# Altium PCB A5000_8MB.pcbdoc (part 2 of 2)
Units mm, origin at the board's own origin, x right, y up, seen from the top; angles counter-clockwise.
Board outline 99.95 x 80.31 mm, 4 copper layers (TopLayer, GND, VCC, BottomLayer), stack 1.659 mm thick; 71 components, 180 nets, 691 pads, 418 vias.
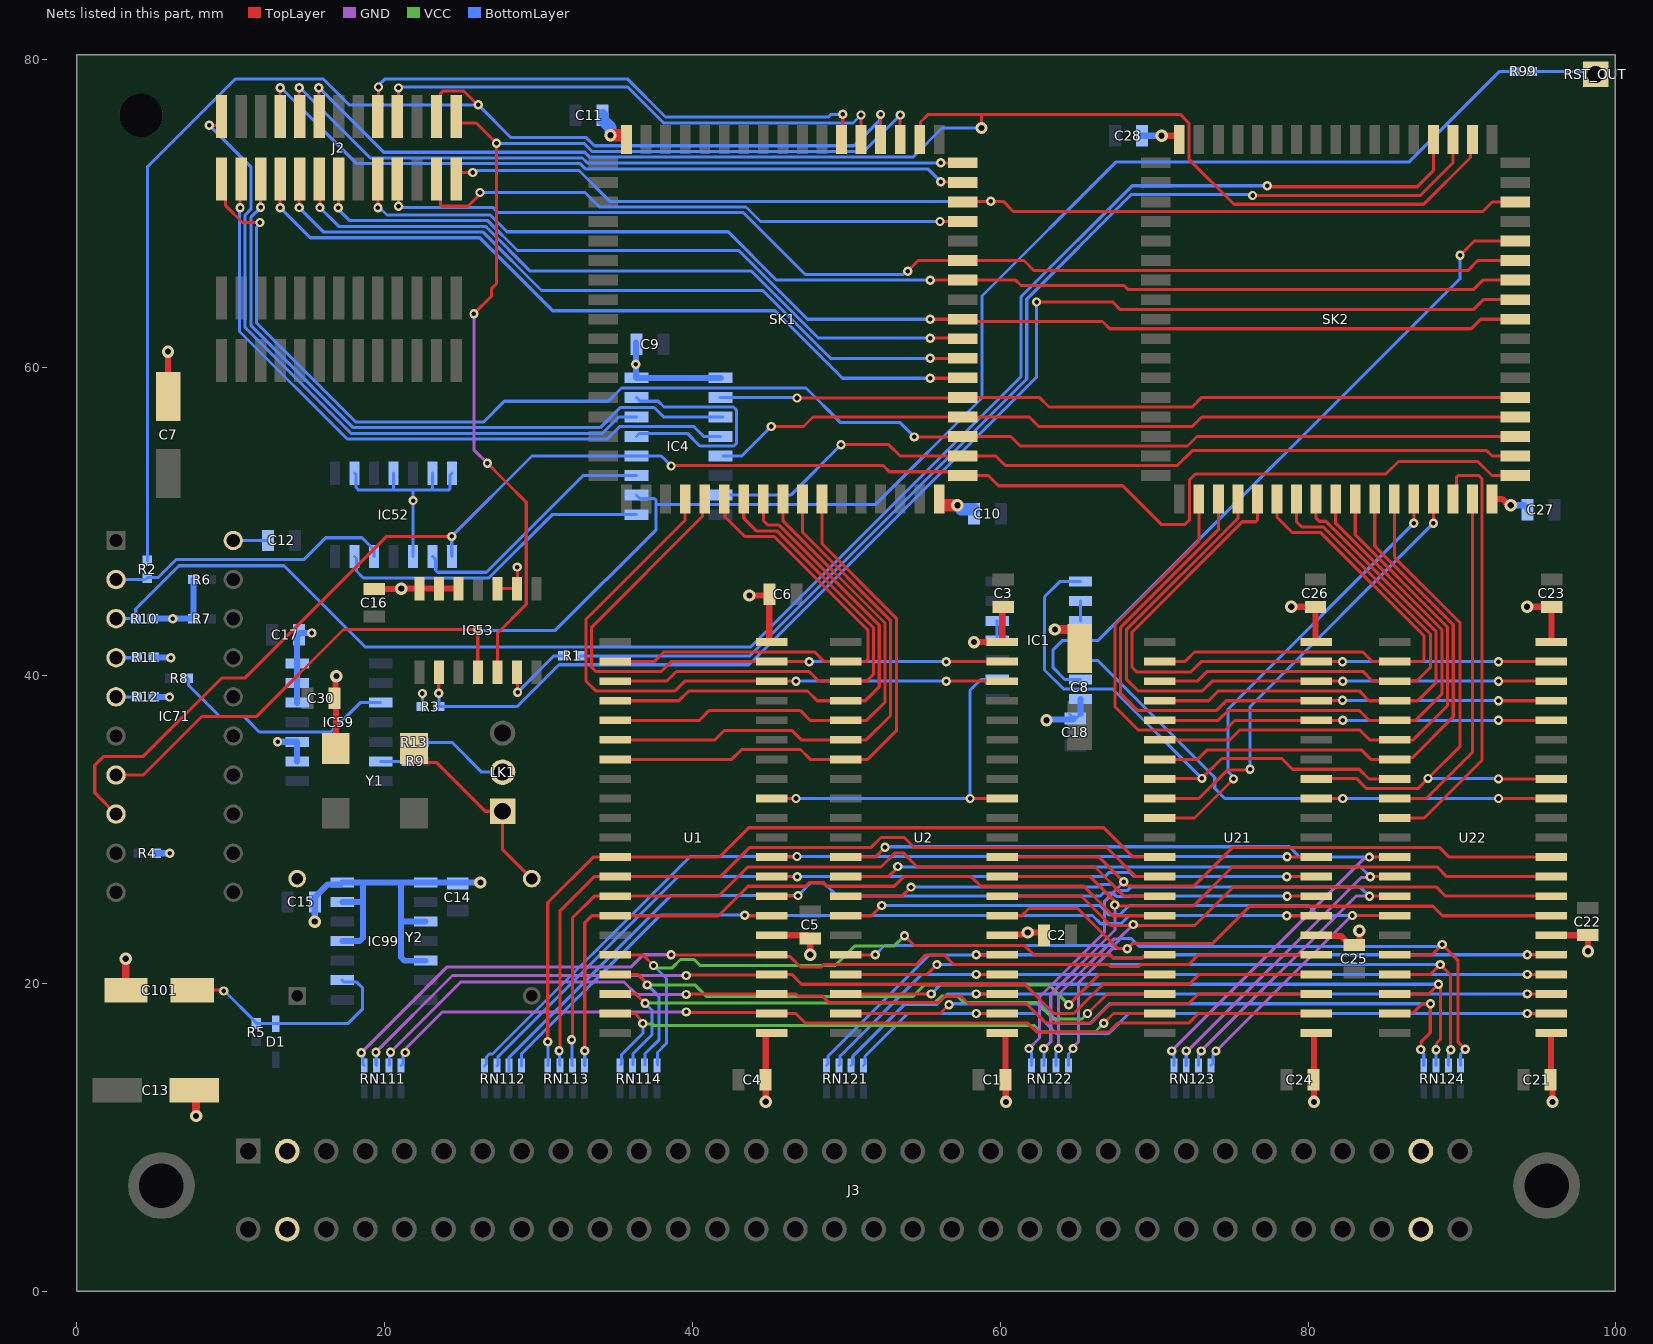
[diagram p4: the nets of this part, all layers, seen from the top]

## Via types
v1: diameter 0.6, hole 0.3, TopLayer to BottomLayer, tented both sides, 338 vias
v2: diameter 0.8, hole 0.4, TopLayer to BottomLayer, tented both sides, 80 vias

## Nets (pads, with @x,y where several pads share a name; then routed paths per layer and width w, separated by ;. In a path a pad name is that pad's centre, name@x,y a point inside that pad or via, vN(x,y) a via of type N, cw(c..) or ccw(c..) an arc to the next point about the centre after c; other vN are vias at no path point) (continued)
M1RA2: SK1.30 U1.19 U2.19 | length 42.1
  TopLayer w0.2: SK1.30@39.522,51.464 39.522,50.101 33.079,43.658 33.079,39.628 33.71,38.997 38.872,38.997 39.499,39.624 44.895,39.624 v1(46.722,39.624) ; v1(56.487,39.624) U2.19@60.192,39.624
  BottomLayer w0.2: v1(46.722,39.624) v1(56.487,39.624)
M1RA3: SK1.31 U1.20 U2.20 | length 41.1
  TopLayer w0.2: SK1.31@40.792,51.464 40.64,51.312 40.64,50.327 33.449,43.136 33.449,40.528 33.718,40.259 37.976,40.259 38.611,40.894 44.895,40.894 v1(47.579,40.894) ; v1(56.487,40.894) U2.20@60.192,40.894
  BottomLayer w0.2: v1(47.579,40.894) v1(56.487,40.894)
M1RA4: SK1.32 U1.23 U2.23 | length 32.7
  TopLayer w0.2: U1.23@34.735,40.894 37.512,40.894 38.147,41.529 47.929,41.529 48.564,40.894 U2.23@49.962,40.894 51.278,40.894 51.396,41.012 51.396,42.948 45.322,49.022 43.405,49.022 42.1,50.327 42.1,51.427 SK1.32@42.062,51.464
M1RA5: SK1.33 U1.24 U2.24 | length 33.4
  TopLayer w0.2: U1.24@34.735,39.624 38.316,39.624 38.951,40.259 47.579,40.259 48.214,39.624 50.032,39.624 51.321,39.624 51.766,40.069 51.766,43.101 45.475,49.392 44.15,49.392 43.332,50.209 SK1.33@43.332,51.464
M1RA6: SK1.34 U1.25 U2.25 | length 34.1
  TopLayer w0.2: U1.25@34.735,38.354 39.116,38.354 39.753,38.991 47.471,38.991 48.108,38.354 U2.25@49.962,38.354 51.224,38.354 52.136,39.266 52.136,43.254 45.628,49.762 44.903,49.762 44.602,50.063 SK1.34@44.602,51.464
M1RA7: SK1.35 U1.26 U2.26 | length 34.7
  TopLayer w0.2: U1.26@34.735,37.084 40.454,37.084 41.097,37.726 46.995,37.726 47.637,37.084 50.032,37.084 51.331,37.084 52.506,38.259 52.506,43.407 45.872,50.041 SK1.35@45.872,51.464
M1RA8: SK1.36 U1.27 U2.27 | length 35.8
  TopLayer w0.2: U1.27@34.735,35.814 41.458,35.814 42.077,36.433 46.446,36.433 47.064,35.814 50.032,35.814 51.296,35.814 52.876,37.394 52.876,43.561 47.142,49.294 SK1.36@47.142,51.464
M1RA9: SK1.37 U1.28 U2.28 | length 36.9
  TopLayer w0.2: U1.28@34.735,34.544 42.561,34.544 43.2,35.183 47.014,35.183 47.653,34.544 50.205,34.544 51.384,34.544 53.246,36.406 53.246,43.714 48.412,48.548 SK1.37@48.412,51.464
M1WE: IC1.2 U1.13 U2.13 | length 24.4
  TopLayer w0.2: U1.13@44.895,32.004 v1(46.722,32.004) ; v1(58.037,32.004) U2.13@60.192,32.004
  BottomLayer w0.2: v1(46.722,32.004) v1(58.037,32.004) 58.037,39.028 58.749,39.74 IC1.2@59.788,39.74
M2ABRT: IC53.2 R3.1 SK2.53 | length 86.4
  TopLayer w0.2: v1(23.512,38.834) 23.512,40.197 IC53.2@23.529,40.214 ; v1(62.358,64.262) 67.306,64.262 67.804,63.764 90.737,63.764 91.387,64.414 SK2.53@93.472,64.414
  BottomLayer w0.2: v1@23.521,38.822 R3.1@23.521,37.978 28.61,37.978 31.326,40.695 43.677,40.695 62.358,59.376 v1(62.358,64.262)
M2DBE: IC1.11 IC1.13 SK2.56 | length 45.2
  TopLayer w0.2: v1(89.877,67.304) 90.797,68.224 SK2.56@93.472,68.224
  BottomLayer w0.2: IC1.13@65.212,39.74 64.183,39.74 63.431,40.492 63.431,41.658 64.053,42.28 IC1.11@65.212,42.28 66.369,42.28 89.877,65.788 v1(89.877,67.304)
M2nCAS0: SK2.39 U21.31 | length 29.2
  TopLayer w0.2: U21.31@70.362,30.734 72.616,30.734 v1(75.156,33.274) ; v1(86.872,49.885) SK2.39@86.872,51.464
  BottomLayer w0.2: v1(75.156,33.274) 75.156,33.382 74.804,33.733 74.804,37.817 v1(86.872,49.885)
M2nCAS1: SK2.40 U21.30 | length 29.1
  TopLayer w0.2: U21.30@70.362,32.004 72.898,32.004 74.738,33.844 76.168,33.844 v1(76.229,33.905) ; v1(88.142,49.885) SK2.40@88.142,51.464
  BottomLayer w0.2: v1(76.229,33.905) 76.229,37.972 v1(88.142,49.885)
M2nCAS2: SK2.41 U22.31 | length 28.8
  TopLayer w0.2: U22.31@85.631,30.734 87.538,30.734 91.302,34.498 91.302,52.777 91.094,52.984 89.754,52.984 89.637,52.867 89.637,51.689 SK2.41@89.412,51.464
M2nCAS3: SK2.42 U22.30 | length 22.7
  TopLayer w0.2: U22.30@85.631,32.004 87.674,32.004 90.682,35.012 SK2.42@90.682,51.464
M2nRAS: SK2.38 U21.14 U22.14 | length 36.8
  TopLayer w0.2: U21.14@80.334,33.274 80.368,33.308 83.122,33.308 83.791,32.639 87.123,32.639 v1(87.792,33.308) 89.877,35.393 89.877,43.406 85.602,47.681 SK2.38@85.602,51.464 ; v1(92.374,33.274) U22.14@95.758,33.274
  BottomLayer w0.2: v1(87.792,33.308) 87.809,33.291 92.357,33.291 v1(92.374,33.274)
M2OE: IC1.8 U21.29 U22.29 | length 37
  TopLayer w0.2: U21.29@70.319,33.274 70.336,33.291 73.081,33.291 v1(73.098,33.308) 74.394,34.603 78.287,34.603 78.988,33.902 83.33,33.902 83.958,33.274 U22.29@85.598,33.274
  BottomLayer w0.2: IC1.8@65.212,46.09 63.858,46.09 62.874,45.106 62.874,40.354 64.116,39.112 67.295,39.112 v1(73.098,33.308)
M2RA0: SK2.28 U21.17 U22.17 | length 45
  TopLayer w0.2: SK2.28@72.902,51.464 72.902,48.726 67.45,43.273 67.45,37.958 68.949,36.459 74.629,36.459 75.254,37.084 80.479,37.084 v1(82.247,37.084) ; v1(92.374,37.084) U22.17@95.758,37.084
  BottomLayer w0.2: v1(82.247,37.084) v1(92.374,37.084)
M2RA1: SK2.29 U21.18 U22.18 | length 44
  TopLayer w0.2: SK2.29@74.172,51.464 74.172,49.473 67.82,43.12 67.82,38.814 68.921,37.712 74.034,37.712 74.676,38.354 80.479,38.354 80.492,38.367 82.22,38.367 v1(82.233,38.381) ; v1(92.374,38.354) U22.18@95.758,38.354
  BottomLayer w0.2: v1(82.233,38.381) 82.247,38.367 92.361,38.367 v1(92.374,38.354)
M2RA2: SK2.30 U21.19 U22.19 | length 42.9
  TopLayer w0.2: SK2.30@75.442,51.464 75.442,50.219 68.19,42.967 68.19,39.748 68.943,38.995 73.135,38.995 73.764,39.624 80.479,39.624 v1(82.247,39.624) ; v1(92.374,39.624) U22.19@95.758,39.624
  BottomLayer w0.2: v1(82.247,39.624) v1(92.374,39.624)
M2RA3: SK2.31 U21.20 U22.20 | length 42.4
  TopLayer w0.2: SK2.31@76.712,51.464 76.712,50.102 76.595,49.984 75.73,49.984 68.56,42.814 68.56,40.522 68.851,40.231 72.397,40.231 73.06,40.894 80.479,40.894 v1(82.233,40.894) ; v1(92.374,40.894) U22.20@95.758,40.894
  BottomLayer w0.2: v1(82.233,40.894) v1(92.374,40.894)
M2RA4: SK2.32 U21.23 U22.23 | length 33.3
  TopLayer w0.2: U21.23@70.319,40.894 71.982,40.894 72.614,41.526 83.555,41.526 84.187,40.894 85.598,40.894 86.36,40.894 87.413,40.894 87.53,41.011 87.53,42.577 80.831,49.276 78.983,49.276 77.982,50.277 SK2.32@77.982,51.464
M2RA5: SK2.33 U21.24 U22.24 | length 33.9
  TopLayer w0.2: U21.24@70.319,39.624 72.799,39.624 73.443,40.268 83.543,40.268 84.187,39.624 85.598,39.624 87.045,39.624 87.95,40.529 87.95,42.68 80.984,49.646 79.59,49.646 79.252,49.984 SK2.33@79.252,51.464
M2RA6: SK2.34 U21.25 U22.25 | length 34.4
  TopLayer w0.2: U21.25@70.319,38.354 73.533,38.354 74.174,38.995 83.322,38.995 83.962,38.354 85.598,38.354 86.36,38.354 87.122,38.354 88.32,39.552 88.32,42.833 81.137,50.016 80.715,50.016 80.522,50.209 SK2.34@80.522,51.464
M2RA7: SK2.35 U21.26 U22.26 | length 35.1
  TopLayer w0.2: U21.26@70.319,37.084 74.168,37.084 74.802,37.718 83.328,37.718 83.962,37.084 85.598,37.084 86.995,37.084 88.69,38.779 88.69,42.987 81.792,49.885 SK2.35@81.792,51.464
M2RA8: SK2.36 U21.27 U22.27 | length 36.1
  TopLayer w0.2: U21.27@70.319,35.814 74.93,35.814 75.576,36.46 83.343,36.46 83.989,35.814 86.836,35.814 89.06,38.038 89.06,43.14 83.062,49.138 SK2.36@83.062,51.464
M2RA9: SK2.37 U21.28 U22.28 | length 37
  TopLayer w0.2: U21.28@70.319,34.544 72.827,34.544 73.445,35.161 83.46,35.161 84.077,34.544 85.598,34.544 85.714,34.66 86.781,34.66 89.43,37.309 89.43,43.293 84.332,48.391 SK2.37@84.332,51.464
M2WE: IC1.12 U21.13 U22.13 | length 36.4
  TopLayer w0.2: U21.13@80.479,32.004 v1(82.247,32.004) ; v1(92.374,32.004) U22.13@95.758,32.004
  BottomLayer w0.2: IC1.12@65.323,41.01 65.37,40.963 66.343,40.963 73.934,33.372 73.934,32.659 74.588,32.004 v1(82.247,32.004) v1(92.374,32.004)
MFLBK: IC4.7 SK1.45 SK2.45 | length 54.1
  TopLayer w0.2: v1(49.652,54.991) 52.756,54.991 53.492,54.254 SK1.45@57.552,54.254 59.712,54.254 60.332,53.634 71.508,53.634 72.478,54.604 91.602,54.604 91.952,54.254 SK2.45@93.472,54.254
  BottomLayer w0.2: IC4.7@41.809,51.714 46.376,51.714 v1(49.652,54.991)
MnBW: R1.1 SK2.63 | length 74.6
  TopLayer w0.2: v1(76.393,71.185) 87.293,71.185 89.412,73.304 SK2.63@89.412,74.824
  BottomLayer w0.2: R1.1@32.722,41.275 43.734,41.275 61.717,59.258 61.717,64.446 68.519,71.247 76.331,71.247 v1(76.393,71.185)
MnSDRQ: IC4.5 SK1.47 SK2.47 | length 53.1
  TopLayer w0.2: v1(45.122,56.174) 47.209,56.174 47.829,56.794 SK1.47@57.552,56.794 61.88,56.794 62.5,56.174 72.477,56.174 73.097,56.794 SK2.47@93.472,56.794
  BottomLayer w0.2: IC4.5@41.984,54.254 43.202,54.254 v1(45.122,56.174)
MnVDRQ: IC4.2 SK1.48 SK2.48 | length 52.2
  TopLayer w0.2: v1(46.792,58.022) 57.51,58.022 SK1.48@57.552,58.064 62.541,58.064 63.161,57.444 72.478,57.444 73.098,58.064 SK2.48@93.472,58.064
  BottomLayer w0.2: IC4.2@41.798,58.064 46.75,58.064 v1(46.792,58.022)
MRST: IC4.12 IC52.1 IC71.8 SK1.44 SK2.44 | length 111.2
  TopLayer w0.2: IC71.8@2.54,30.988 1.158,32.37 1.158,34.158 1.742,34.742 4.318,34.742 9.398,39.822 10.917,39.822 20.129,49.034 v1(24.356,49.034) ; v1(38.611,53.604) 38.641,53.634 52.386,53.634 52.786,53.234 57.302,53.234 SK1.44@57.552,52.984 59.219,52.984 59.88,52.324 67.951,52.324 70.461,49.814 71.996,49.814 72.282,50.1 72.282,52.694 72.674,53.086 85.054,53.086 85.872,53.904 91.032,53.904 91.952,52.984 SK2.44@93.472,52.984
  BottomLayer w0.2: IC52.1@24.384,47.727 24.356,47.755 v1(24.356,49.034) 29.576,54.254 IC4.12@36.359,54.254 37.961,54.254 v1(38.611,53.604)
MRST_IN: IC4.14 J2.25 | length 44.3
  TopLayer w0.2: v1(8.607,75.745) 9.128,75.745 9.398,76.015 J2.25@9.398,76.327
  BottomLayer w0.2: v1(8.607,75.745) 11.303,73.049 11.303,70.286 10.933,69.916 10.933,62.604 17.811,55.726 34.15,55.726 35.218,56.794 IC4.14@36.359,56.794
MRSTn: IC4.11 IC52.2 | length 16.7
  BottomLayer w0.2: IC52.2@23.114,47.727 23.318,47.523 23.318,46.819 23.435,46.702 26.616,46.702 32.899,52.984 IC4.11@36.359,52.984
nBW: IC53.5 J2.1 SK1.63 | length 69.6
  TopLayer w0.2: J2.1@24.638,76.327 24.638,76.16 24.908,75.89 25.946,75.89 v1(27.261,74.574) 27.261,65.452 26.928,65.119 26.928,64.625 v1(25.797,63.494) ; v1(26.676,53.781) 27.789,52.668 29.196,51.261 29.196,44.614 27.339,42.756 IC53.5@27.339,40.214 ; SK1.63@53.492,74.824 v1(53.492,76.415)
  GND w0.2: v1(25.797,63.494) 25.797,54.66 v1(26.676,53.781)
  BottomLayer w0.2: v1(27.261,74.574) 32.946,74.574 33.476,74.044 51.122,74.044 v1(53.492,76.415)
NetC101_2: C101.2 D1.1 IC99.9 R5.1 | length 16.3
  TopLayer w0.203: C101.2@7.495,19.55 C101.2@7.938,19.55 ; C101.2@8.636,18.851 C101.2@7.938,19.55 ; v1@9.543,19.572 9.52,19.55 C101.2@7.938,19.55
  BottomLayer w0.203: v1(9.543,19.492) 9.591,19.492 11.656,17.428 R5.1@11.656,17.378 12.915,17.378 17.61,17.378 18.568,18.336 18.568,19.693 18.187,20.074 17.358,20.074 IC99.9@17.239,20.193
NetIC1_4: IC1.4 IC1.5 | length 1.3
  BottomLayer w0.2: IC1.4@59.788,42.28 IC1.5@59.788,43.55
NetIC1_9: IC1.9 IC1.10 | length 1.3
  BottomLayer w0.2: IC1.10@65.212,43.55 IC1.9@65.212,44.82
NetIC4_13: IC4.13 IC4.15 | length 16
  BottomLayer w0.2: IC4.13@36.359,55.524 36.561,55.726 39.653,55.726 40.475,54.904 42.695,54.904 42.854,55.063 42.854,57.256 42.665,57.444 38.153,57.444 37.783,57.814 36.609,57.814 IC4.15@36.359,58.064
NetIC53_6: IC53.6 R1.2 | length 5.3
  TopLayer w0.2: IC53.6@28.609,40.214 28.635,40.187 v1(28.635,38.908)
  BottomLayer w0.2: v1(28.635,38.908) 31.002,41.275 R1.2@31.622,41.275
NetIC59_3: IC59.3 R8.2 | length 15
  BottomLayer w0.2: R8.2@7.19,39.822 7.263,39.749 7.263,39.339 9.264,37.338 10.838,37.338 11.852,36.324 16.505,36.324 18.408,38.227 IC59.3@19.73,38.227
NetIC59_6: IC59.6 R9.2 | length 1.7
  BottomLayer w0.2: IC59.6@19.73,34.417 R9.2@21.449,34.417
NetIC71_4: IC71.4 R11.1 | length 1.4
  BottomLayer w0.2: IC71.4@2.54,41.148 3.864,41.148 R11.1@3.895,41.179
NetIC71_5: IC71.5 R12.1 | length 1.4
  BottomLayer w0.2: IC71.5@2.54,38.608 R12.1@3.895,38.608
NetLK1_1: LK1.1 Y1.3 Y2.3 | length 12.7
  TopLayer w0.203: Y1.3@21.908,35.247 21.908,35.147 22.706,34.349 23.355,34.349 26.53,31.173 LK1.1@27.664,31.173 27.664,28.684 Y2.3@29.554,26.794
NetLK1_2: LK1.2 R13.2 | length 6
  BottomLayer w0.2: R13.2@22.484,35.647 24.369,35.647 26.303,33.713 LK1.2@27.664,33.713
NetR99_1: R99.1 RST_OUT.1 | length 4.2
  BottomLayer w0.2: R99.1@94.53,79.248 98.481,79.248 RST_OUT.1@98.679,79.05
nHSYC: J2.26 SK1.46 SK2.46 | length 98.4
  TopLayer w0.2: J2.26@9.398,72.257 9.668,71.987 9.668,70.526 10.764,69.43 v1(11.891,69.43) ; v1(54.412,55.499) 57.527,55.499 SK1.46@57.552,55.524 60.669,55.524 61.289,54.904 72.166,54.904 72.786,55.524 SK2.46@93.472,55.524
  BottomLayer w0.2: v1(11.891,69.43) 11.891,69.331 11.673,69.113 11.673,62.911 18.118,56.466 26.426,56.466 27.774,57.814 34.522,57.814 35.385,58.677 47.37,58.677 49.603,56.444 53.467,56.444 v1(54.412,55.499)
nIOGT: J2.2 SK1.58 SK2.58 | length 72.4
  TopLayer w0.2: J2.2@24.638,72.257 24.638,72.412 24.908,72.682 v1(25.721,72.682) ; SK1.58@57.552,70.764 57.595,70.807 60.184,70.807 60.846,70.144 91.353,70.144 91.973,70.764 SK2.58@93.472,70.764
  BottomLayer w0.2: v1(25.721,72.682) 25.797,72.758 25.99,72.758 26.038,72.805 32.622,72.805 34.62,70.807 v1(59.376,70.807)
nIORQ: J2.19 SK1.59 | length 48.7
  TopLayer w0.2: J2.19@13.208,76.327 v1(13.208,78.181) ; v1(56.129,72.072) 57.515,72.072 SK1.59@57.552,72.034
  BottomLayer w0.2: v1(13.208,78.181) 13.26,78.181 18.19,73.252 32.699,73.252 33.037,72.914 55.287,72.914 v1(56.129,72.072)
nMREQ: J2.8 SK1.55 SK2.55 | length 77.1
  TopLayer w0.2: J2.8@20.828,72.257 20.899,72.186 v1(20.899,70.486) ; v1(53.986,66.268) 53.986,66.275 54.665,66.954 SK1.55@57.552,66.954 61.54,66.954 62.19,66.304 90.382,66.304 91.032,66.954 SK2.55@93.472,66.954
  BottomLayer w0.2: v1(20.899,70.486) 20.976,70.409 21.199,70.409 21.216,70.392 27.046,70.392 27.371,70.067 43.319,70.067 47.332,66.054 50.896,66.054 53.669,66.054 53.882,66.268 v1(53.986,66.268)
nREF1: IC4.9 IC52.6 | length 21.1
  BottomLayer w0.2: IC52.6@18.034,47.727 18.167,47.594 18.167,46.781 18.617,46.332 26.769,46.332 30.882,50.444 IC4.9@36.359,50.444
nRMCS: J2.17 SK1.60 | length 47
  TopLayer w0.2: v1(14.445,78.181) 14.445,76.36 J2.17@14.478,76.327 ; v1(56.132,73.304) SK1.60@57.552,73.304
  BottomLayer w0.2: v1(14.445,78.181) 14.497,78.181 19.057,73.622 32.853,73.622 33.17,73.304 v1(56.132,73.304)
nRW: J2.15 SK1.62 SK2.62 | length 91.9
  TopLayer w0.2: v1(15.72,78.181) 15.72,76.355 J2.15@15.748,76.327 ; SK1.62@54.762,74.824 54.819,74.881 54.819,75.962 55.317,76.46 58.728,76.46 ; v2(58.773,75.565) 58.773,76.415 58.728,76.46 ; SK2.62@90.682,74.824 90.551,74.693 90.551,73.654 87.512,70.615 75.186,70.615 72.252,73.549 72.252,75.891 71.683,76.46 58.728,76.46
  BottomLayer w0.2: v1(15.72,78.181) 15.748,78.181 19.937,73.992 33.006,73.992 33.323,73.674 54.326,73.674 56.216,75.565 v2(58.773,75.565)
nSDAK: J2.20 SK1.49 | length 50.8
  TopLayer w0.2: v1(13.208,70.394) J2.20@13.208,72.257 ; v1(55.453,59.309) 57.527,59.309 SK1.49@57.552,59.334
  BottomLayer w0.2: v1(13.208,70.394) 15.167,68.436 26.18,68.436 30.922,63.694 45.357,63.694 49.742,59.309 v1(55.453,59.309)
nSDRQ: IC4.4 J2.24 | length 44.7
  TopLayer w0.2: v1(10.605,70.394) 10.605,72.194 J2.24@10.668,72.257
  BottomLayer w0.2: v1(10.605,70.394) 10.563,70.352 10.563,62.35 17.557,55.356 34.465,55.356 35.29,56.182 40.069,56.182 40.727,55.524 IC4.4@41.809,55.524
nSIRQ: J2.4 SK1.57 | length 37
  TopLayer w0.2: J2.4@23.368,72.257 23.617,72.008 23.617,70.603 23.734,70.486 25.409,70.486 26.194,71.271 v1(26.194,71.379) ; v1(56.082,69.494) SK1.57@57.552,69.494
  BottomLayer w0.2: v1(26.194,71.379) 33.018,71.379 33.96,70.437 43.473,70.437 44.415,69.494 v1(56.082,69.494)
nVDAK: J2.18 SK1.50 | length 49
  TopLayer w0.2: v1(14.445,70.398) 14.445,72.224 J2.18@14.478,72.257 ; v1(55.453,60.604) SK1.50@57.552,60.604
  BottomLayer w0.2: v1(14.445,70.398) 16.037,68.806 26.395,68.806 30.19,65.01 44.564,65.01 48.97,60.604 v1(55.453,60.604)
nVDRQ: IC4.3 J2.22 | length 44
  TopLayer w0.2: v1(11.938,70.414) J2.22@11.938,72.257
  BottomLayer w0.2: v1(11.938,70.414) 11.938,70.398 11.303,69.763 11.303,62.758 17.964,56.096 33.997,56.096 35.308,57.407 37.51,57.407 38.122,56.794 IC4.3@41.964,56.794
nVIDW: J2.16 SK1.51 | length 47.2
  TopLayer w0.2: J2.16@15.748,72.257 15.793,72.212 v1(15.793,70.398) ; v1(55.453,61.911) 57.516,61.911 SK1.51@57.552,61.874
  BottomLayer w0.2: v1(15.793,70.398) 17.014,69.176 26.548,69.176 29.456,66.268 43.829,66.268 48.186,61.911 v1(55.453,61.911)
phi1: J2.9 SK1.66 | length 35.1
  TopLayer w0.2: J2.9@19.558,76.327 19.599,76.368 v1(19.599,78.233) ; SK1.66@49.682,74.824 49.762,74.904 v1(49.762,76.46)
  BottomLayer w0.2: v1(19.599,78.233) 19.599,78.342 20.001,78.744 35.796,78.744 38.25,76.289 48.83,76.289 49,76.46 v1(49.762,76.46)
phi2: J2.7 SK1.65 | length 34.7
  TopLayer w0.2: J2.7@20.828,76.327 20.899,76.398 v1(20.899,78.174) ; SK1.65@50.952,74.824 v1(50.952,76.415)
  BottomLayer w0.2: v1(20.899,78.174) 20.959,78.233 35.783,78.233 38.126,75.89 50.427,75.89 v1(50.952,76.415)
RAMD0: RN111.4 U1.2 U21.2 | length 62.4
  TopLayer w0.2: v1(39.596,18.134) 39.646,18.084 45.096,18.084 U1.2@45.146,18.034 46.706,18.034 47.338,17.402 61.786,17.402 62.362,16.826 67.046,16.826 67.622,17.402 72.236,17.402 72.868,18.034 U21.2@80.522,18.034
  GND w0.2: v1(21.329,15.498) 21.405,15.575 21.405,15.791 23.748,18.134 v1(39.596,18.134)
  BottomLayer w0.2: RN111.4@21.07,14.654 21.195,14.779 21.195,15.257 21.329,15.39 v1(21.329,15.498)
RAMD1: RN111.3 U1.3 U21.3 | length 65.2
  TopLayer w0.2: v1(39.596,19.274) 39.61,19.289 45.132,19.289 U1.3@45.146,19.304 46.722,19.304 46.852,19.174 48.441,19.174 48.881,18.734 55.989,18.734 56.429,19.174 57.446,19.174 57.939,18.681 61.692,18.681 62.972,17.402 65.899,17.402 67.178,18.681 72.245,18.681 72.868,19.304 U21.3@80.522,19.304
  GND w0.2: v1(20.379,15.522) 24.935,20.078 35.544,20.078 36.348,19.274 v1(39.596,19.274)
  BottomLayer w0.2: RN111.3@20.27,14.654 20.325,14.708 20.325,15.468 v1(20.379,15.522)
RAMD2: RN111.2 U1.4 U21.4 | length 66.2
  TopLayer w0.2: v1(39.596,20.503) 39.631,20.538 45.111,20.538 U1.4@45.146,20.574 46.444,20.574 47.085,19.933 61.583,19.933 63.486,18.029 64.77,18.029 66.674,19.933 72.28,19.933 72.921,20.574 U21.4@80.522,20.574
  GND w0.2: v1(19.429,15.522) 24.41,20.503 v1(39.596,20.503)
  BottomLayer w0.2: v1(19.429,15.522) 19.45,15.501 19.45,14.675 RN111.2@19.47,14.654
RAMD3: RN111.1 U1.5 U21.5 | length 66.9
  TopLayer w0.2: v1(38.611,21.844) 45.142,21.844 45.144,21.846 45.262,21.728 46.344,21.728 47.014,21.058 48.38,21.058 48.53,21.208 54.531,21.208 55.166,21.844 56.36,21.844 56.996,21.208 67.054,21.208 67.174,21.088 69.017,21.088 69.137,21.208 72.232,21.208 72.868,21.844 U21.5@80.522,21.844
  GND w0.2: v1(18.48,15.489) 24.058,21.067 36.025,21.067 36.806,21.849 38.607,21.849 v1(38.611,21.844)
  BottomLayer w0.2: v1(18.48,15.489) 18.48,15.381 18.593,15.267 18.593,14.731 RN111.1@18.67,14.654
RAMD4: RN112.4 U1.7 U21.7 | length 58.4
  TopLayer w0.2: v1@43.405,24.393 43.414,24.384 U1.7@45.146,24.384 ; v1(78.616,24.384) U21.7@80.522,24.384
  BottomLayer w0.2: RN112.4@28.886,14.63 28.883,14.633 28.883,15.397 37.909,24.423 v1(43.396,24.423) 43.416,24.404 65.991,24.404 66.531,23.864 67.844,23.864 68.384,24.404 78.596,24.404 v1(78.616,24.384)
RAMD5: RN112.3 U1.8 U21.8 | length 60.3
  TopLayer w0.2: U1.8@45.146,25.654 v1@46.872,25.654 ; v1(78.636,25.654) U21.8@80.522,25.654
  BottomLayer w0.2: RN112.3@28.087,14.279 28.087,15.2 38.58,25.693 v1(46.855,25.693) 47.669,26.508 48.551,26.508 49.405,25.654 66.48,25.654 66.701,25.875 67.311,25.875 67.54,25.646 68.406,25.646 68.414,25.654 v1(78.636,25.654)
RAMD6: RN112.2 U1.9 U21.9 | length 60.5
  TopLayer w0.2: U1.9@45.146,26.924 v1(46.805,26.924) ; v1(78.616,26.924) U21.9@80.522,26.924
  BottomLayer w0.2: RN112.2@27.286,14.63 27.375,14.719 27.375,15.241 39.058,26.924 v1(46.805,26.924) 66.785,26.924 67.046,27.185 68.451,27.185 68.712,26.924 v1(78.616,26.924)
RAMD7: RN112.1 U1.10 U21.10 | length 61.6
  TopLayer w0.2: U1.10@45.146,28.194 v1@46.805,28.194 ; v1(78.636,28.219) 78.649,28.207 80.509,28.207 U21.10@80.522,28.194
  BottomLayer w0.2: RN112.1@26.486,14.63 26.611,14.755 26.611,15.205 26.803,15.397 27.008,15.397 39.844,28.233 v1(46.787,28.233) v1@78.616,28.233
RAMD8: RN113.1 U1.33 U21.33 | length 53.2
  TopLayer w0.2: v1(30.594,16.203) 30.594,25.244 33.543,28.194 U1.33@34.986,28.194 41.735,28.194 43.645,30.104 66.724,30.104 68.634,28.194 U21.33@70.362,28.194
  BottomLayer w0.2: v1(30.594,16.203) 30.602,16.195 30.602,14.66 RN113.1@30.595,14.654
RAMD9: RN113.2 U1.34 U21.34 | length 52.1
  TopLayer w0.2: v1(31.333,15.606) 31.401,15.675 31.401,24.713 33.612,26.924 U1.34@34.986,26.924 41.809,26.924 43.714,28.829 51.618,28.829 52.253,29.464 53.759,29.464 54.394,28.829 66.899,28.829 68.804,26.924 U21.34@70.362,26.924
  BottomLayer w0.2: v1(31.333,15.606) 31.364,15.575 31.364,14.685 RN113.2@31.395,14.654
RAMD10: RN113.3 U1.35 U21.35 | length 50.7
  TopLayer w0.2: v1(32.145,16.333) 32.201,16.389 32.201,24.244 33.611,25.654 U1.35@34.986,25.654 41.686,25.654 43.587,27.555 52.25,27.555 53.142,28.448 53.721,28.448 54.614,27.555 66.154,27.555 68.055,25.654 U21.35@70.362,25.654
  BottomLayer w0.2: v1(32.145,16.333) 32.17,16.308 32.17,14.679 RN113.3@32.195,14.654
RAMD11: RN113.4 U1.36 U21.36 | length 49.1
  TopLayer w0.2: v1(33.001,15.606) 33.001,23.923 33.462,24.384 U1.36@34.986,24.384 41.689,24.384 43.607,26.302 47.353,26.302 47.606,26.554 48.462,26.554 48.714,26.302 53.11,26.302 53.732,26.924 58.123,26.924 58.745,26.302 65.415,26.302 66.863,24.854 66.863,24.848 67.197,24.514 67.203,24.514 67.333,24.384 U21.36@70.362,24.384
  BottomLayer w0.2: RN113.4@32.995,14.654 32.998,14.657 32.998,15.603 v1(33.001,15.606)
RAMD12: RN114.4 U1.38 U21.38 | length 44.6
  TopLayer w0.2: U1.38@34.986,21.844 36.774,21.844 v1(37.465,21.153) ; v1(53.775,23.083) 54.394,22.464 61.565,22.464 62.185,21.844 67.135,21.844 67.349,21.63 69.22,21.63 69.28,21.69 70.208,21.69 U21.38@70.362,21.844
  VCC w0.2: v1(37.465,21.153) 37.573,21.153 37.727,20.999 38.686,20.999 39.224,21.538 40.112,21.538 40.497,21.153 49.285,21.153 50.56,22.428 53.12,22.428 v1(53.775,23.083)
  BottomLayer w0.2: v1(37.465,21.153) 38.316,20.302 38.316,16.09 37.725,15.499 RN114.4@37.725,14.7
RAMD13: RN114.3 U1.39 U21.39 | length 43.6
  TopLayer w0.2: U1.39@34.986,20.574 36.449,20.574 37.098,19.926 v1@37.098,19.858 ; v1(64.45,18.604) 66.42,20.574 U21.39@70.362,20.574
  VCC w0.2: v1(37.064,19.892) 40.153,19.892 40.922,19.123 54.303,19.123 55.072,19.892 63.161,19.892 v1(64.45,18.604)
  BottomLayer w0.2: RN114.3@36.925,14.7 36.905,14.72 36.905,15.397 37.833,16.325 37.833,19.123 v1@37.098,19.858
RAMD14: RN114.2 U1.40 U21.40 | length 41.8
  TopLayer w0.2: U1.40@34.986,19.304 36.318,19.304 36.918,18.704 v1(36.92,18.704) ; v1@36.919,18.699 v1@36.919,18.703 ; v1(65.669,18.034) 66.939,19.304 U21.40@70.362,19.304
  VCC w0.2: v1(36.92,18.704) 55.719,18.704 56.189,19.174 57.211,19.174 57.651,18.734 62.378,18.734 63.435,17.677 65.312,17.677 v1(65.669,18.034)
  BottomLayer w0.2: RN114.2@36.125,14.7 36.125,15.397 37.374,16.646 37.374,18.244 v1@36.919,18.699
RAMD15: RN114.1 U1.41 U21.41 | length 39.7
  TopLayer w0.2: U1.41@34.986,18.034 36.271,18.034 36.494,17.812 36.494,17.773 v1@36.774,17.493 ; v1(66.724,17.402) 67.356,18.034 U21.41@70.362,18.034
  VCC w0.2: v1(36.774,17.385) 36.797,17.361 37.374,17.361 37.474,17.261 62.189,17.261 62.624,16.826 66.148,16.826 v1(66.724,17.402)
  BottomLayer w0.2: RN114.1@35.325,14.7 35.375,14.75 35.375,15.333 36.774,16.731 v1@36.774,17.493
RAMD16: RN121.4 U2.2 U22.2 | length 49.1
  TopLayer w0.2: v1(58.437,18.034) U2.2@60.122,18.034 ; v1(94.234,18.034) U22.2@95.791,18.034
  BottomLayer w0.2: RN121.4@51.111,14.654 51.214,14.757 51.214,15.251 53.997,18.034 v1(58.437,18.034) 62.34,18.034 63.624,16.75 67.054,16.75 68.338,18.034 v1(94.234,18.034)
RAMD17: RN121.3 U2.3 U22.3 | length 49.4
  TopLayer w0.2: v1(58.437,19.304) U2.3@60.122,19.304 ; v1(94.234,19.304) U22.3@95.791,19.304
  BottomLayer w0.2: RN121.3@50.311,14.654 50.414,14.757 50.414,15.251 53.767,18.604 55.859,18.604 56.559,19.304 v1(58.437,19.304) v1(94.234,19.304)
RAMD18: RN121.2 U2.4 U22.4 | length 50.7
  TopLayer w0.2: v1(58.435,20.574) U2.4@60.122,20.574 ; v1(94.234,20.574) U22.4@95.791,20.574
  BottomLayer w0.2: RN121.2@49.511,14.654 49.593,14.736 49.593,15.272 54.895,20.574 v1(58.435,20.574) v1(94.234,20.574)
RAMD19: RN121.1 U2.5 U22.5 | length 52.2
  TopLayer w0.2: v1(58.435,21.844) U2.5@60.122,21.844 ; v1(94.234,21.853) 94.239,21.849 95.787,21.849 U22.5@95.791,21.844
  BottomLayer w0.2: RN121.1@48.711,14.654 48.81,14.753 48.81,15.254 55.4,21.844 v1(58.435,21.844) 58.44,21.849 67.13,21.849 67.335,21.644 69.234,21.644 69.439,21.849 94.229,21.849 v1(94.234,21.853)
RAMD20: RN122.4 U2.7 U22.7 | length 48.1
  TopLayer w0.2: U2.7@60.122,24.384 61.398,24.384 61.868,24.854 65.034,24.854 67.645,22.243 v1(68.253,22.243) 68.599,22.59 73.81,22.59 76.219,24.999 88.113,24.999 88.728,24.384 U22.7@95.791,24.384
  GND w0.2: v1(64.729,15.75) 64.729,15.858 65.089,16.217 65.089,20.049 67.303,22.263 68.233,22.263 v1(68.253,22.243)
  BottomLayer w0.2: RN122.4@64.425,14.654 64.438,14.666 64.438,15.404 64.729,15.696 v1(64.729,15.75)
RAMD21: RN122.3 U2.8 U22.8 | length 49.1
  TopLayer w0.2: U2.8@60.122,25.654 65.28,25.654 67.186,23.749 68.569,23.749 v1(68.634,23.814) ; v1@68.704,23.749 72.643,23.749 75.154,26.259 88.318,26.259 88.923,25.654 U22.8@95.791,25.654
  GND w0.2: v1(63.779,15.75) 63.779,19.263 67.399,22.883 67.703,22.883 v1(68.634,23.814)
  BottomLayer w0.2: RN122.3@63.625,14.654 63.625,15.487 63.779,15.642 v1(63.779,15.75)
RAMD22: RN122.2 U2.9 U22.9 | length 50.3
  TopLayer w0.2: U2.9@60.122,26.924 65.835,26.924 67.439,25.32 v1@67.554,25.205 ; v1(67.433,25.084) v1@67.554,25.205 ; U22.9@95.791,26.924 89.015,26.924 88.391,27.547 75.077,27.547 72.56,25.03 67.729,25.03 v1@67.554,25.205
  GND w0.2: v1(62.829,15.75) 63.278,16.199 63.278,19.285 67.454,23.462 67.454,25.062 v1(67.433,25.084)
  BottomLayer w0.2: RN122.2@62.825,14.654 62.827,14.656 62.827,15.748 v1(62.829,15.75)
RAMD23: RN122.1 U2.10 U22.10 | length 52.3
  TopLayer w0.2: U2.10@60.122,28.194 66.434,28.194 68.32,26.308 72.569,26.308 75.069,28.807 88.564,28.807 89.177,28.194 U22.10@95.791,28.194
  GND w0.2: v1(61.868,15.75) 62.553,16.435 62.553,19.106 66.78,23.333 66.78,25.324 v1@68.042,26.586
  BottomLayer w0.2: v1(61.868,15.75) 61.868,15.642 62.025,15.484 RN122.1@62.025,14.654
  other v1: 68.017,26.586
RAMD24: RN123.1 U2.33 U22.33 | length 55.3
  TopLayer w0.2: U2.33@49.962,28.194 51.871,28.194 v1(52.506,28.829) ; v1(83.982,28.194) U22.33@85.631,28.194
  GND w0.2: v1(71.135,15.604) 71.138,15.604 83.651,28.117 83.905,28.117 v1(83.982,28.194)
  BottomLayer w0.2: v1(52.506,28.829) 52.544,28.867 78.794,28.867 79.468,28.194 v1(83.982,28.194) ; v1(71.135,15.604) 71.135,15.496 71.285,15.346 RN123.1@71.285,14.654
RAMD25: RN123.2 U2.34 U22.34 | length 53.8
  TopLayer w0.2: U2.34@49.962,26.924 52.73,26.924 v1@53.361,27.555 ; v1(84.035,26.924) U22.34@85.631,26.924
  GND w0.2: v1(72.085,15.604) 72.183,15.604 83.435,26.856 83.968,26.856 v1(84.035,26.924)
  BottomLayer w0.2: v1(53.343,27.58) 53.368,27.555 83.404,27.555 v1(84.035,26.924) ; RN123.2@72.085,14.654 v1(72.085,15.604)
RAMD26: RN123.3 U2.35 U22.35 | length 52.6
  TopLayer w0.2: U2.35@49.962,25.654 53.606,25.654 v1(54.198,26.245) ; v1(83.989,25.654) U22.35@85.631,25.654
  GND w0.2: v1(73.06,15.604) 83.11,25.654 v1(83.989,25.654)
  BottomLayer w0.2: v1(54.198,26.245) 66.343,26.245 66.513,26.415 67.295,26.415 67.693,26.016 68.253,26.016 68.482,26.245 83.398,26.245 v1(83.989,25.654) ; RN123.3@72.885,14.654 72.885,15.321 73.06,15.496 v1(73.06,15.604)
RAMD27: RN123.4 U2.36 U22.36 | length 50.3
  TopLayer w0.2: U2.36@49.962,24.384 51.626,24.384 v1(52.296,25.053) ; v1(82.881,24.404) 82.891,24.394 85.622,24.394 U22.36@85.631,24.384
  GND w0.2: v1(74.01,15.604) 74.045,15.604 82.845,24.404 v1(82.881,24.404)
  BottomLayer w0.2: v1(52.296,25.053) 66.448,25.053 67.052,24.449 67.78,24.449 68.384,25.053 80.03,25.053 80.679,24.404 v1(82.881,24.404) ; RN123.4@73.685,14.654 73.81,14.779 73.81,15.296 74.01,15.496 v1(74.01,15.604)
RAMD28: RN124.4 U2.38 U22.38 | length 51.4
  TopLayer w0.2: U2.38@49.962,21.844 v1(51.871,21.844) ; U22.38@85.631,21.844 88.046,21.844 v1(88.715,22.513) 89.733,21.495 89.733,16.191 v1(90.214,15.71)
  BottomLayer w0.2: v1(51.871,21.844) 52.48,22.453 67.373,22.453 67.823,22.903 68.516,22.903 69.029,22.39 88.398,22.39 88.445,22.437 88.639,22.437 v1(88.715,22.513) ; RN124.4@89.915,14.654 89.915,15.404 90.214,15.703 v1(90.214,15.71)
RAMD29: RN124.3 U2.39 U22.39 | length 49
  TopLayer w0.2: U2.39@49.962,20.574 55.245,20.574 v1(55.88,21.209) ; U22.39@85.631,20.574 87.956,20.574 v1(88.59,21.208) 89.265,20.533 v1(89.265,15.671)
  BottomLayer w0.2: v1(55.88,21.209) v1(88.59,21.208) ; RN124.3@89.115,14.654 89.115,15.413 89.265,15.563 v1(89.265,15.671)
RAMD30: RN124.2 U2.40 U22.40 | length 47.3
  TopLayer w0.2: U2.40@49.962,19.304 v1(55.512,19.304) ; U22.40@85.631,19.304 87.845,19.304 v1(88.474,19.933) 88.474,19.825 88.591,19.708 88.591,16.345 88.34,16.095 88.34,15.696 v1(88.315,15.671)
  BottomLayer w0.2: v1(55.512,19.304) 56.141,19.933 v1(88.474,19.933) ; RN124.2@88.315,14.654 v1(88.315,15.671)
RAMD31: RN124.1 U2.41 U22.41 | length 46.2
  TopLayer w0.2: U2.41@49.962,18.034 56.095,18.034 v1(56.665,18.604) ; U22.41@85.631,18.034 85.681,18.084 86.83,18.084 87.413,18.666 v1(87.956,18.666) ; v1(87.325,15.696) 87.325,16.161 87.936,16.771 v1@87.936,18.646
  BottomLayer w0.2: v1(56.665,18.604) 56.728,18.666 62.57,18.666 63.86,17.376 65.818,17.376 67.108,18.666 v1(87.956,18.666) ; v1(87.325,15.696) 87.325,15.587 87.515,15.397 RN124.1@87.515,14.654
RCLK: J2.3 R2.2 SK1.64 | length 84.5
  TopLayer w0.2: J2.3@23.368,76.327 23.638,76.597 23.638,77.821 23.801,77.985 25.117,77.985 26.025,77.076 v1(26.076,77.076) ; SK1.64@52.222,74.824 v1(52.222,76.453)
  BottomLayer w0.2: R2.2@4.578,47.45 4.578,73.031 10.298,78.751 16.009,78.751 17.684,77.076 v1(26.076,77.076) 28.207,74.944 33.1,74.944 33.63,74.414 50.507,74.414 52.16,76.067 52.16,76.39 v1(52.222,76.453)
REF1: IC52.5 IC71.2 R2.1 | length 18.6
  BottomLayer w0.2: IC71.2@2.54,46.228 4.456,46.228 R2.1@4.578,46.35 5.272,46.35 6.445,47.523 14.749,47.523 16.17,48.944 18.525,48.944 19.304,48.164 IC52.5@19.304,47.727
REF2: IC71.3 R10.1 SK2.64 | length 107.4
  TopLayer w0.2: v1(77.35,71.817) 77.413,71.754 87.094,71.754 88.142,72.802 SK2.64@88.142,74.824
  BottomLayer w0.2: IC71.3@2.54,43.688 3.695,43.688 3.822,43.815 3.822,44.31 6.64,47.128 13.455,47.128 18.735,41.848 43.784,41.848 61.347,59.411 61.347,64.599 68.565,71.817 v1(77.35,71.817)
SEQ: J2.10 SK1.54 SK2.54 | length 78.2
  TopLayer w0.2: v1(19.558,70.394) J2.10@19.558,72.257 ; v1(55.453,65.684) SK1.54@57.552,65.684 60.997,65.684 61.347,65.334 68.044,65.334 68.314,65.064 90.737,65.064 91.357,65.684 SK2.54@93.472,65.684
  BottomLayer w0.2: v1(19.558,70.394) 19.666,70.394 20.145,69.916 26.855,69.916 27.942,68.828 42.316,68.828 45.459,65.684 v1(55.453,65.684)
SPMD: J2.14 SK1.52 SK2.52 | length 81.9
  TopLayer w0.2: v1(16.988,70.394) 16.988,72.227 J2.14@17.018,72.257 ; v1(55.453,63.144) SK1.52@57.552,63.144 57.705,62.992 66.638,62.992 67.106,62.524 90.591,62.524 91.211,63.144 SK2.52@93.472,63.144
  BottomLayer w0.2: v1(16.988,70.394) 16.988,70.286 17.728,69.546 26.701,69.546 28.635,67.612 43.009,67.612 47.476,63.144 v1(55.453,63.144)
SResetn: IC4.10 IC53.4 IC71.7 R99.2 | length 118.9
  TopLayer w0.2: IC71.7@2.54,33.528 4.318,33.528 8.128,37.338 11.677,37.338 17.327,42.988 v1(26.046,42.988) 26.046,40.237 IC53.4@26.069,40.214
  BottomLayer w0.2: v1(26.046,42.988) 26.108,42.926 31.092,42.926 37.639,49.473 37.639,51.094 ; IC4.10@36.359,51.714 36.58,51.493 37.522,51.493 37.639,51.376 37.639,51.094 ; R99.2@93.091,79.248 92.456,79.248 86.58,73.372 67.528,73.372 58.806,64.651 58.806,58.022 51.879,51.094 37.639,51.094
VCC: C1.1 C2.1 C3.1 C4.1 C5.1 C6.1 C7.1 C8.1 C9.1 C10.1 C11.1 C12.1 C13.1 C14.1 C15.1 C16.1 C17.1 C18.1 C21.1 C22.1 C23.1 C24.1 C25.1 C26.1 C27.1 C28.1 C30.1 C101.1 IC1.14 IC4.1 IC4.16 IC52.3 IC52.9 IC52.11 IC52.13 IC52.14 IC53.9 IC53.10 IC53.12 IC53.13 IC53.14 IC59.9 IC59.10 IC59.12 IC59.13 IC59.14 IC71.20 IC99.1 IC99.3 IC99.5 IC99.11 IC99.13 IC99.14 J3.A2 J3.A31 J3.C2 J3.C31 R3.2 R4.2 R6.2 R7.2 R10.2 R11.2 R12.2 SK1.9 SK1.43 SK2.9 SK2.43 U1.1 U1.6 U1.21 U2.1 U2.6 U2.21 U21.1 U21.6 U21.21 U22.1 U22.6 U22.21 Y1.4 Y2.4 | length 153.5
  TopLayer w0.2: C101.1@3.17,19.575 C101.1@3.195,19.55 ; IC53.10@27.339,45.638 IC53.9@28.609,45.638 28.62,45.649 v1(28.62,47.037) ; SK1.43@56.032,51.464 56.032,51.309 SK1.43@56.282,51.059 ; C8.1@65.118,41.776 C8.1@65.151,41.743 ; U22.21@95.762,42.164 U22.21@95.821,42.223
  TopLayer w0.4: v2(5.922,61.038) 5.922,58.147 C7.1@5.943,58.126 ; C13.1@7.623,13.053 C13.1@7.747,12.93 ; Y1.4@16.828,35.247 16.828,38.448 C30.1@16.748,38.528 16.803,38.583 16.803,39.898 v2(16.858,39.953) ; C16.1@19.326,45.6 19.345,45.619 21.06,45.619 v2(21.079,45.638) IC53.14@22.259,45.638 IC53.13@23.529,45.638 IC53.12@24.799,45.638 ; v2(43.693,45.19) 44.915,45.19 C6.1@44.992,45.268 44.992,42.204 U1.21@44.952,42.164 ; v2(44.756,12.296) C4.1@44.756,13.721 44.756,16.71 44.81,16.764 U1.1@44.952,16.764 ; U1.6@44.952,23.114 U1.6@45.146,23.114 47.426,23.114 C5.1@47.435,23.123 ; C5.1@47.646,22.894 47.655,22.885 v2(47.655,21.849) ; v2(58.286,42.164) U2.21@60.122,42.164 60.122,44.389 C3.1@60.192,44.459 ; U2.6@60.122,23.114 60.176,23.168 61.552,23.168 61.677,23.293 v2(61.786,23.293) 62.665,23.293 C2.1@62.835,23.123 ; C1.1@60.342,13.721 U2.1@60.342,16.724 ; v2(60.369,12.291) 60.357,12.303 60.357,13.549 C1.1@60.372,13.564 ; v2(70.485,75.063) 71.482,75.063 71.632,74.913 SK2.9@71.632,74.824 ; v2(78.902,44.459) C26.1@80.479,44.459 80.479,42.309 U21.21@80.334,42.164 ; v2(80.386,12.291) 80.386,16.71 U21.1@80.479,16.71 ; U21.6@80.522,23.114 80.576,23.06 82.145,23.06 82.615,22.59 83.26,22.59 83.33,22.66 v2(83.33,23.405) ; SK2.43@91.952,51.464 92.602,51.464 93.012,51.054 v2(93.17,51.054) ; v2(94.234,44.459) C23.1@95.821,44.459 U22.21@95.821,42.223 ; C21.1@95.749,14.351 95.791,14.393 95.791,16.71 95.762,16.739 U22.1@95.762,16.764 ; U22.6@95.762,23.114 98.162,23.114 C22.1@98.171,23.123 98.183,23.111 v2(98.183,22.074) ; v2(95.876,12.293) C21.1@95.876,13.843
  TopLayer w0.508: C101.1@3.17,19.575 v2(3.17,21.594) ; v2(7.747,11.373) C13.1@7.747,12.93
  TopLayer w0.6: v2(63.544,42.987) 64.651,42.987 65.118,42.52 C8.1@65.118,41.776
  TopLayer w0.8: v2(34.671,75.095) SK1.9@35.662,75.095 ; SK1.43@56.282,51.059 v2(57.21,51.059)
  BottomLayer w0.2: IC71.20@10.16,48.768 C12.1@12.426,48.768 ; IC52.9@18.034,53.151 18.142,53.043 18.142,52.205 18.308,52.039 20.648,52.039 ; IC52.11@20.574,53.151 20.574,52.113 20.648,52.039 ; IC52.3@21.844,47.727 v1(21.844,51.359) 21.844,52.039 ; R3.2@22.421,37.978 22.448,38.005 v1(22.448,38.822) ; 23.114,52.126 IC52.13@23.114,53.151 ; IC52.14@24.384,53.151 24.252,53.019 24.252,52.156 24.135,52.039 21.844,52.039 ; C10.1@58.037,50.769 C10.1@58.296,50.509 ; C18.1@64.498,37.492 64.788,37.202 C18.1@64.875,37.202 64.922,37.202 C18.1@65.212,37.492 ; 20.648,52.039 21.844,52.039
  BottomLayer w0.381: IC99.11@17.239,22.733 18.367,22.733 18.59,22.956 18.59,25.273 ; IC99.13@17.239,25.273 18.59,25.273 ; IC99.14@17.239,26.543 18.49,26.543 ; IC99.5@22.663,21.463 21.285,21.463 21.057,21.691 21.057,24.07 ; IC99.3@22.663,24.003 21.124,24.003 21.057,24.07 ; v2(26.219,26.543) IC99.1@22.663,26.543 21.124,26.543 ; 18.49,26.543 18.59,26.443 18.59,25.273 ; 18.49,26.543 21.124,26.543 ; 21.057,24.07 21.057,26.476 21.124,26.543
  BottomLayer w0.4: R10.2@4.922,43.788 5.022,43.688 v1(6.223,43.688) R7.2@7.578,43.688 R6.2@7.578,46.228 ; R12.2@4.995,38.608 5.004,38.599 6.004,38.599 v1(6.014,38.589) ; R11.2@4.995,41.179 5.01,41.163 6.081,41.163 v1(6.096,41.148) ; R4.2@5.122,28.448 5.123,28.449 6.031,28.449 v1(6.032,28.451) ; v1(13.044,35.687) IC59.10@14.306,35.687 IC59.9@14.306,34.417 ; IC59.12@14.306,38.227 IC59.13@14.306,39.497 IC59.14@14.306,40.767 14.306,42.531 C17.1@14.423,42.649 14.531,42.756 v1(15.262,42.756) ; v2(15.456,24.003) C15.1@15.456,25.278 15.456,25.583 16.291,26.418 17.114,26.418 IC99.14@17.239,26.543 ; C9.1@36.332,61.64 36.332,59.334 IC4.16@36.359,59.334 IC4.1@41.809,59.334 IC4.1@41.852,59.334 ; v2(63.002,37.084) 63.061,37.143 64.729,37.143 C18.1@64.788,37.202 ; C18.1@65.212,37.492 IC1.14@65.212,38.47 ; C28.1@69.206,75.063 v2(70.485,75.063) ; v2(93.17,51.054) 94.056,51.054 94.246,50.864 C27.1@94.246,50.764
  BottomLayer w0.8: C11.1@34.157,76.39 34.157,76.105 34.671,75.591 v2(34.671,75.095) ; v2(57.21,51.059) 57.465,50.804 C10.1@58.286,50.804
  other v1: 36.315,60.226
pads on no net: IC52.4 IC52.8 IC52.10 IC52.12 IC53.8 IC53.11 IC59.8 IC59.11 IC71.12 IC71.13 IC71.14 IC71.15 IC71.16 IC71.17 IC99.2 IC99.4 IC99.6 IC99.10 IC99.12 J3.A6 J3.A14 J3.A15 J3.A16 J3.A17 J3.A18 J3.A25 J3.A28 J3.A29 J3.A30 J3.C10 J3.C14 J3.C15 J3.C16 J3.C17 J3.C20 J3.C27 J3.C28 J3.C29 J3.C30 J3.MH1 J3.MH2 SK2.49 SK2.50 SK2.51 SK2.57 SK2.59 SK2.60 SK2.65 SK2.66 U1.11 U1.12 U1.15 U1.16 U1.32 U2.11 U2.12 U2.15 U2.16 U2.32 U21.11 U21.12 U21.15 U21.16 U21.32 U22.11 U22.12 U22.15 U22.16 U22.32 Y1.1 Y2.1

## Polygon pours and split planes (outlines as drawn)
GND on GND "NONET_L-01_P-001" (solid, remove dead copper, pour order 1): 0,0 99.949,0 99.949,80.315 0,80.315
VCC on VCC "NONET_L-01_P-001" (solid, remove dead copper, pour order 2): 0,0 99.949,0 99.949,80.315 0,80.315
GND on TopLayer "NONET_L-01_P-001" (solid, remove dead copper, pour order 0): 0,0 99.949,0 99.949,80.315 0,80.315
GND on BottomLayer "NONET_L-01_P-001" (solid, remove dead copper, pour order 3): 0,0 99.949,0 99.949,80.315 0,80.315

## Keep-outs
KeepOutLayer:
  the board outline again, w0.254

## Silkscreen, mask and mechanical layers (free items; w line width, h text height)
TopOverlay:
  lines w0.254: 30.734,76.659 32.429,78.31 ; 66.677,76.675 68.372,78.326
  text "v1.2" at 7.536,64.894 h1.25 r90
  text "A5000 8MB" at 2.518,60.198 h1.52 r90
  text "(C) IanJ, '25" at 4.601,59.563 h1.25 r90
  text "Slave MEMC" at 65.063,55.778 h1.52 r90
  text "Master MEMC" at 29.143,55.72 h1.52 r90
  text "ACT08" at 22.513,42.278 h1.52
  text "1 2 3" at 25.581,30.973 h1.2 r90
  text "F  X" at 31.142,30.871 h1.52 r90
BottomOverlay:
  text "ACT174" at 39.815,58.928 h1.52 r90
  text "AC04" at 23.363,49.757 h1.52
  text "AC32" at 17.765,39.568 h1.52 r90
  text "AC04" at 61.879,39.366 h1.52 r270
  text "HCT14" at 20.656,26.048 h1.52 r90
Shape:
  the board outline again, w0.254